# EAGLE board Chamber VIP_Finalbrd(2) (EAGLE 7.6.0)
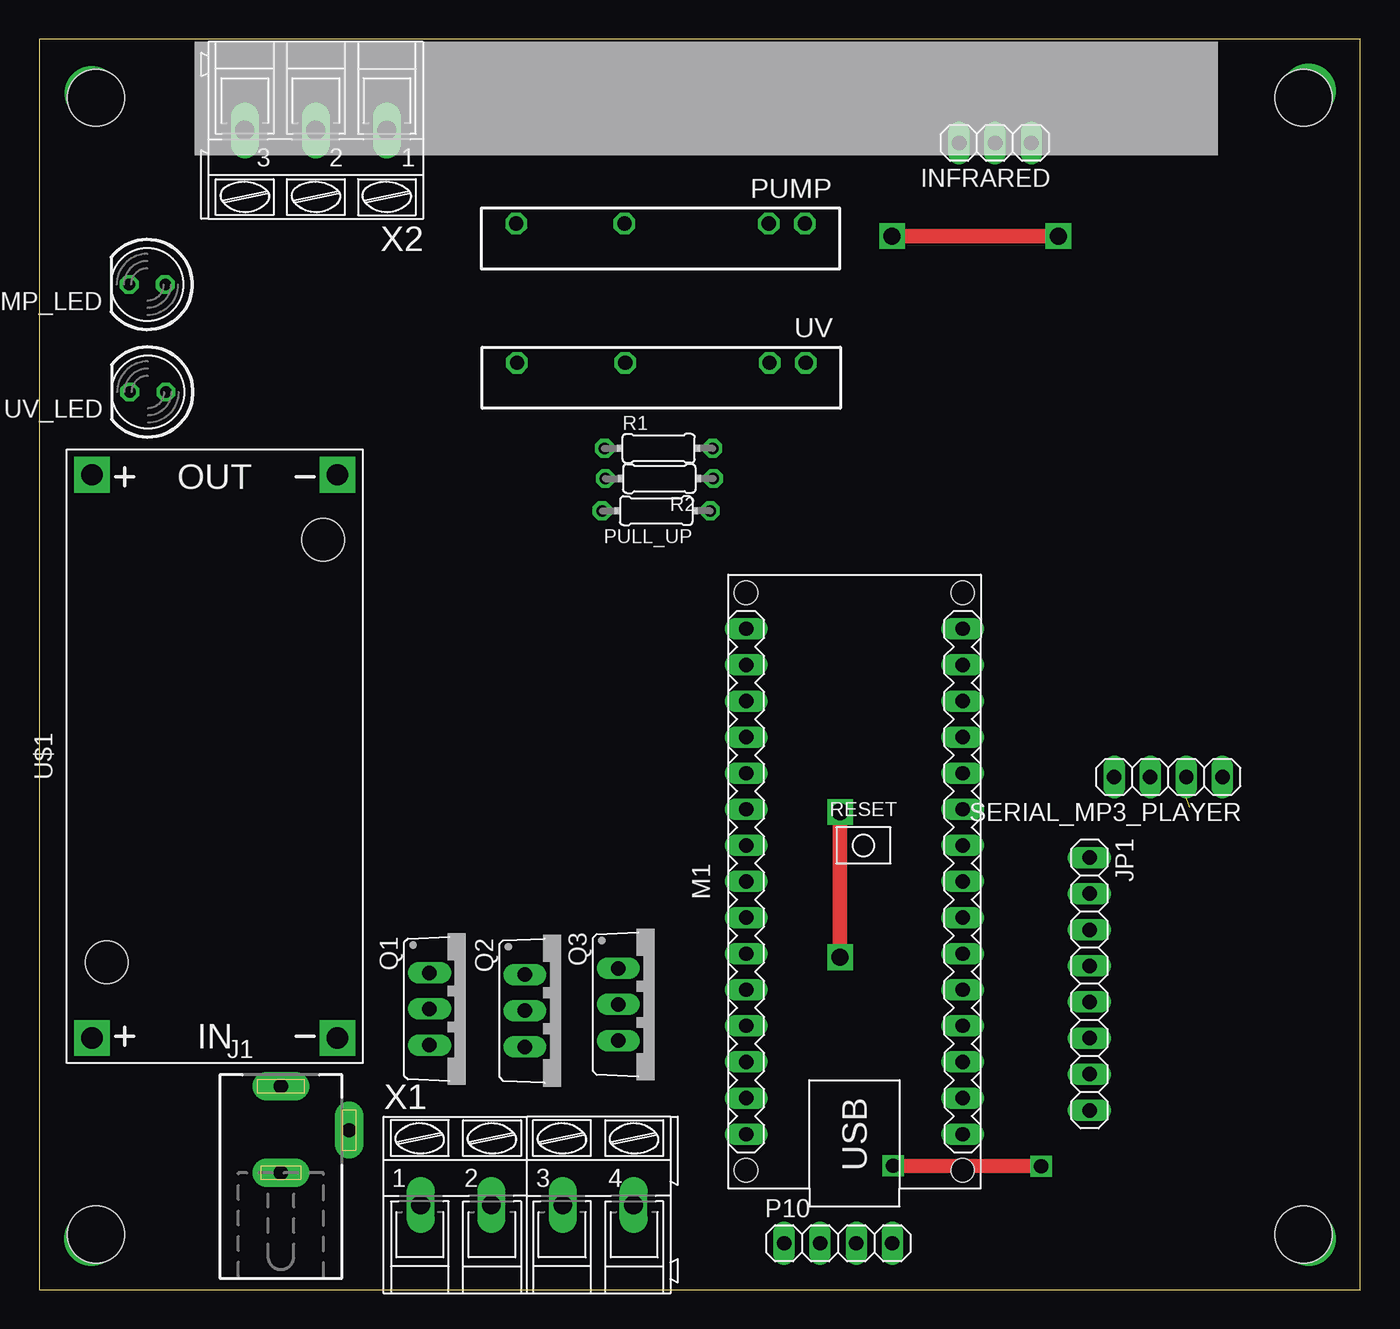
[diagram p0: board, top side]
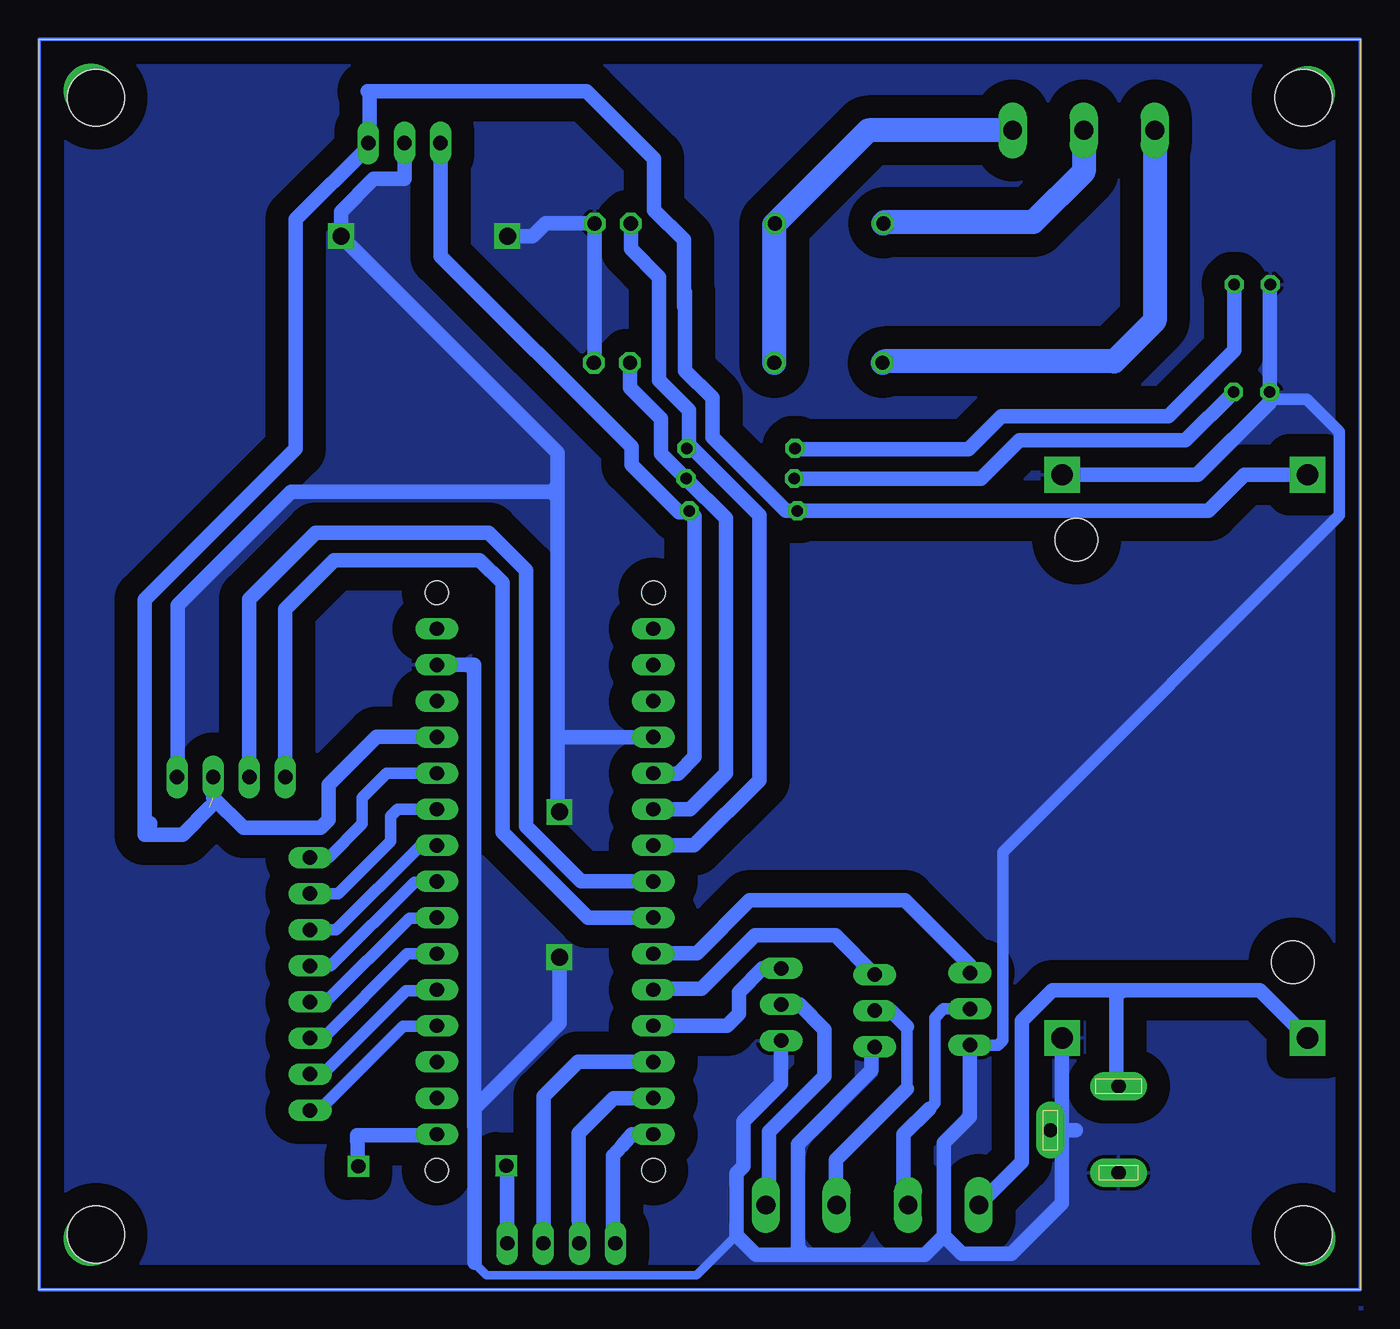
[diagram p1: board, bottom side, seen from below]

Size 93 x 88 mm. Coordinates in mm from the lower left corner, seen from the top.
Outline: 0,0 93,0 93,88 0,88 0,0
Copper layers (1*16): Top 0.035mm / dielectric 1.5mm / Bottom 0.035mm
Design rules "default": minimum track width 10mil, minimum drill 24mil, track to track 8mil, track to pad 8mil, pad to pad 8mil, via to via 8mil, smd to smd 8mil, copper to edge 40mil, drill to drill 8mil, minimum pad ring 10mil, minimum via ring 8mil, stop-mask expansion 4mil, vias tented up to drill 0mil, thermal gap 10mil
Holes 4 mm at 4.01,83.89 89,83.88 89,3.89 4.01,3.89

## Footprints (pad centres in the part's own frame; a part is rotated, then mirrored left to right if it is on the bottom)
1X03 = drill 1.016 long: 1 -2.54,0; 2 0,0; 3 2.54,0
DCJ0202 = drill 1 pad 2 long: 1 0,3.1; 2 4.8,0; 3 0,-3
1X08 = drill 1.016 long: 1 -8.89,0; 2 -6.35,0; 3 -3.81,0; 4 -1.27,0; 5 1.27,0; 6 3.81,0; 7 6.35,0; 8 8.89,0
ARDUINO-NANO-3.0 = drill 1 pad 1.524 long: J1.1 17.78,7.62; J1.2 15.24,7.62; J1.3 12.7,7.62; J1.4 10.16,7.62; J1.5 7.62,7.62; J1.6 5.08,7.62; J1.7 2.54,7.62; J1.8 0,7.62; J1.9 -2.54,7.62; J1.10 -5.08,7.62; J1.11 -7.62,7.62; J1.12 -10.16,7.62; J1.13 -12.7,7.62; J1.14 -15.24,7.62; J1.15 -17.78,7.62; J2.1 17.78,-7.62; J2.2 15.24,-7.62; J2.3 12.7,-7.62; J2.4 10.16,-7.62; J2.5 7.62,-7.62; J2.6 5.08,-7.62; J2.7 2.54,-7.62; J2.8 0,-7.62; J2.9 -2.54,-7.62; J2.10 -5.08,-7.62; J2.11 -7.62,-7.62; J2.12 -10.16,-7.62; J2.13 -12.7,-7.62; J2.14 -15.24,-7.62; J2.15 -17.78,-7.62 | hole 1.651: -20.32,7.62; -20.32,-7.62; 20.32,-7.62; 20.32,7.62
1X04 = drill 1.016 long: 1 -3.81,0; 2 -1.27,0; 3 1.27,0; 4 3.81,0
0204/7 = drill 0.813 octagon: 1 -3.81,0; 2 3.81,0
AQG = drill 1 octagon: + -7.62,0; - -10.16,0; O1 2.54,0; O2 10.16,0
LED5MM = drill 0.813 octagon: A -1.27,0; K 1.27,0
TO220BV = drill 1.016 long: D 0,-2.54; G -2.54,-2.54; S 2.54,-2.54
DC-DC-STEP-DOWN-LM2596 = drill 1.5 pad 2.5 square: IN+ -19.812,8.636; IN- -19.812,-8.636; OUT+ 19.812,8.636; OUT- 19.812,-8.636 | hole 3: -14.478,7.62; 15.24,-7.62
AK300/4 = drill 1.321 long: 1 -7.493,0; 2 -2.515,0; 3 2.515,0; 4 7.493,0
AK300/3 = drill 1.321 long: 1 -5.004,0; 2 0,0; 3 5.004,0

## Placement (x,y rotation side)
INFRARED  [1X03]  67.29,80.71 180 top
J1  DCJ0202  [DCJ0202]  17.02,11.23 0 top
JP1  [1X08]  73.93,21.52 270 top
M1  ARDUINO-NANO-3.0#ISP  [ARDUINO-NANO-3.0]  57.39,28.73 90 top
P10  [1X04]  56.24,3.28 0 top
PULL_UP  10k ohm  [0204/7]  43.44,54.82 180 top
PUMP  AQG12105  [AQG]  43.74,75.02 180 top
PUMP_LED  [LED5MM]  7.61,70.74 180 top
Q1  IRF540  [TO220BV]  30.02,19.76 270 top
Q2  IRF540  [TO220BV]  36.74,19.64 270 top
Q3  IRF540  [TO220BV]  43.31,20.08 270 top
R1  1k ohm  [0204/7]  43.61,59.21 0 top
R2  1k ohm  [0204/7]  43.66,57.08 180 top
SERIAL_MP3_PLAYER  [1X04]  79.48,36.08 180 top
U$1  DC-DC-STEP-DOWN-LM2596  [DC-DC-STEP-DOWN-LM2596]  12.37,37.54 90 top
UV  AQG12105  [AQG]  43.79,65.23 180 top
UV_LED  [LED5MM]  7.65,63.17 180 top
X1  [AK300/4]  34.35,5.97 0 top
X2  [AK300/3]  19.47,81.58 180 top

## Library data of the parts
INFRARED JP1 P10 SERIAL_MP3_PLAYER = pinhead
J1 = con-jack; OC_FARNELL: unknown; OC_NEWARK: unknown
M1 U$1 = diy-modules
PULL_UP R1 R2 = rcl
PUMP UV = relay; MF: AROMAT/ MATSUSHITA; MPN: AQG12105; OC_FARNELL: unknown; OC_NEWARK: 20J4759
PUMP_LED UV_LED = led
Q1-Q3 = transistor-power
X1 X2 = con-ptr500; OC_FARNELL: unknown; OC_NEWARK: unknown

## Nets
3V3: M1.J2.14
+5V: INFRARED.1 M1.J2.4 PULL_UP.2 SERIAL_MP3_PLAYER.2 U$1.OUT+
GND: INFRARED.2 J1.2 J1.3 M1.J1.4 M1.J2.2 PUMP.- PUMP_LED.K Q1.S Q2.S Q3.S SERIAL_MP3_PLAYER.1 U$1.IN- U$1.OUT- UV.- UV_LED.K
N$1: Q3.D X1.4
N$2: J1.1 U$1.IN+ X1.1
N$3: Q1.D X1.2
N$4: Q2.D X1.3
N$5: JP1.8 M1.J2.12
N$6: PUMP.O2 X2.2
N$8: M1.J1.12 Q3.G
N$9: M1.J1.6 R2.1 UV.+
N$10: M1.J1.10 Q1.G
N$11: M1.J1.11 Q2.G
N$12: M1.J1.9 SERIAL_MP3_PLAYER.4
N$13: INFRARED.3 M1.J1.5 PULL_UP.1
N$14: R2.2 UV_LED.A
N$16: PUMP_LED.A R1.1
N$17: M1.J1.8 SERIAL_MP3_PLAYER.3
N$20: M1.J1.7 PUMP.+ R1.2
N$25: M1.J1.15 P10.1
N$26: M1.J1.14 P10.2
N$27: M1.J1.13 P10.3
N$28: M1.J2.15 P10.4
N$29: UV.O2 X2.3
N$30: JP1.7 M1.J2.11
N$31: JP1.6 M1.J2.10
N$32: JP1.5 M1.J2.9
N$33: JP1.4 M1.J2.8
N$34: JP1.3 M1.J2.7
N$35: JP1.2 M1.J2.6
N$36: JP1.1 M1.J2.5
S$3: PUMP.O1 UV.O1 X2.1
VIN: M1.J2.1

## Tracks (layer width: path | path; a pad name or v marks a point on that pad's centre or on a via)
+5V  (1 unrouted)
  Bottom 1.016: 47.6,69.22 47.6,70.25 | 47.6,70.25 47.6,72.62 47.62,72.64 47.62,73.88 49.71,75.97 49.71,79.57 54.47,84.33 69.89,84.33 69.74,84.18 69.74,80.79 | 69.74,80.79 INFRARED.1 | 69.74,80.79 69.74,80.51 74.94,75.32 74.94,59.18 85.56,48.56 85.56,32.04 82.89,32.04 80.98,33.95 | 80.75,34.84 SERIAL_MP3_PLAYER.2 80.75,34.64 78.61,32.5 73.19,32.5 72.62,33.08 72.62,35.55 69.25,38.92 65.03,38.92 M1.J2.4 | U$1.OUT+ 8.18,57.35 10.71,54.82 PULL_UP.2 39.64,54.8 40.42,54.8 45.61,60 45.61,62.76 47.54,64.69 47.54,70.18 47.6,70.25
GND  (via drill 1.2)
  Top 1.016: v60.04,74.14 v71.74,74.14 | v56.38,33.63 v56.38,23.4
  Bottom 0.61: 43.91,3.85 46.73,1.04 61.52,1.04 62.35,1.87 62.35,1.92
  Bottom 0.813: U$1.OUT- 11.64,57.35 6.32,62.67 3.79,62.67 1.48,60.37 1.48,54.49 25.18,30.8 25.18,17.55 25.52,17.21 27.47,17.21 Q1.S
  Bottom 1.016: 20.02,11.23 J1.2 21,12.05 U$1.IN- 21,6.08 24.55,2.54 28.06,2.54 29.33,3.8 | Q2.S 34.42,16.88 34.42,15.44 39.6,10.26 39.6,2.96 39.12,2.49 | Q1.S 27.48,12.2 29.33,10.35 29.33,3.8 | 29.33,3.8 30.65,2.49 39.12,2.49 | 39.12,2.49 42.55,2.49 43.91,3.85 43.91,8.21 43.41,8.71 43.41,11.85 40.77,14.5 Q3.S | 71.4,74.05 71.83,74.05 v71.74,74.14 | 56.5,56.59 56.5,38.86 | 62.35,11.47 62.35,12.78 56.38,18.75 v56.38,23.4 | 62.35,11.47 62.35,1.92 | M1.J1.4 56.47,38.89 56.5,38.86 | 56.5,38.86 56.5,33.75 v56.38,33.63 | 62.35,11.47 62.37,11.49 62.37,43.97 M1.J2.2 | INFRARED.2 67.29,78.16 69.45,78.16 71.74,75.87 v71.74,74.14 | v71.74,74.14 56.5,58.9 56.5,56.59 | 83.25,35.7 83.25,48.18 75.28,56.15 56.94,56.15 | 56.94,56.15 56.6,55.81 | 56.5,56.59 56.94,56.15 | PUMP_LED.K 6.38,70.7 UV_LED.K 6.38,62.42 11.44,57.36 20.99,57.36 U$1.OUT- | v60.04,74.14 58.26,74.14 57.36,75.03 PUMP.- 53.9,65.28 UV.-
  pour Bottom (isolate 1.62): 0,88 93,88 93,0 0,0
  pour Bottom (isolate 1.41): 0.33,87.9 0.03,0 0.03,87.92 0.32,87.92 0.32,87.9
  pour Bottom (isolate 1.016): 0.16,88.88 -0.03,-1.31 -0.03,88.99
N$1
  Bottom 1.016: X1.4 41.62,6.19 41.62,11.13 37.71,15.04 37.71,18.3 39.49,20.08 Q3.D
N$2
  Bottom 1.016: 17.16,21.07 21.68,21.07 22.88,19.87 23.54,19.21 23.82,18.93 23.82,9.01 X1.1 | 17.16,21.07 16.84,21.07 | 16.84,21.07 7.07,21.07 U$1.IN+ | 16.77,21 16.84,21.07 | J1.1 17.16,14.48 17.16,21.07
N$3
  Bottom 0.813: 28.44,19.76 29.34,19.76 29.96,19.14 29.96,13.12 30.33,12.75
  Bottom 1.016: 30.33,12.75 32.15,10.94 32.15,6.29 X1.2 | Q1.D 28.44,19.76
N$4
  Bottom 0.813: 31.91,18.52 31.91,14.16
  Bottom 1.016: Q2.D 33.04,19.64 31.91,18.52 | 31.91,14.16 36.92,9.15 36.92,6.03 X1.3
N$5
  Bottom 0.813: JP1.8 73.3,12.63 67.4,18.53 65.05,18.53 M1.J2.12
N$6
  Bottom 1.676: X2.2 19.47,78.69 23.04,75.12 33.48,75.12 PUMP.O2
N$8
  Bottom 1.016: M1.J1.12 44.6,18.57 43.75,19.42 43.75,20.95 42.08,22.62 Q3.G
N$9
  Bottom 1.016: M1.J1.6 49.75,33.83 47.2,33.83 44.67,36.36 44.67,54.29 R2.1 49.23,58.85 49.23,61.3 51.41,63.49 UV.+
N$10
  Bottom 1.016: M1.J1.10 49.72,23.7 46.7,23.7 42.99,27.4 32.05,27.4 27.48,22.84 Q1.G
N$11
  Bottom 1.016: M1.J1.11 49.69,21.19 46.37,21.19 42.62,24.94 36.96,24.94 Q2.G
N$12
  Bottom 1.016: SERIAL_MP3_PLAYER.4 75.67,47.9 72.22,51.35 61.99,51.35 60.4,49.76 60.4,32.21 54.38,26.19 M1.J1.9
N$13
  Bottom 1.016: INFRARED.3 64.75,74.24 64.75,74.23 64.75,72.74 51.32,59.31 51.32,58.06 47.97,54.71 47.35,54.71 PULL_UP.1 46.86,54.43 46.86,37.51 48.05,36.32 49.74,36.32 M1.J1.5
N$14
  Bottom 1.016: UV_LED.A 12.32,59.78 24,59.78 26.7,57.07 39.83,57.07 R2.2
N$16
  Bottom 1.016: PUMP_LED.A 8.88,66.1 13.52,61.46 25.27,61.46 27.58,59.16 39.75,59.16 R1.1
N$17
  Bottom 1.016: M1.J1.8 54.86,28.73 58.73,32.61 58.73,50.63 61.37,53.26 73.54,53.26 78.21,48.59 SERIAL_MP3_PLAYER.3
N$18  (via drill 2.8 pad 3.81)
  other vias: 89.36,3.59
N$20
  Bottom 1.016: R1.2 47.25,59.38 | 47.25,59.38 47.2,59.38 42.31,54.49 42.31,35.87 46.9,31.27 M1.J1.7 | 47.25,59.38 47.25,61.89 49.37,64.01 49.37,71.26 51.34,73.24 51.34,75.01 PUMP.+
N$21  (via drill 2.8 pad 3.81)
  other vias: 3.68,3.6
N$23  (via drill 2.8 pad 3.81)
  other vias: 89.35,84.37
N$24  (via drill 2.8 pad 3.81)
  other vias: 3.71,84.2
N$25
  Bottom 1.016: P10.1 52.59,4.16 52.59,9.43 51.98,10.12 51.26,10.95 M1.J1.15
N$26
  Bottom 1.016: P10.2 55.04,5.3 55.04,11.03 52.58,13.49 M1.J1.14
N$27
  Bottom 1.016: P10.3 57.49,5.21 57.49,13.63 55.08,16.03 M1.J1.13
N$28  (via drill 1)
  Top 1.016: v60.12,8.73 v70.53,8.69
  Bottom 1.016: v70.53,8.69 70.61,10.89 65.07,10.89 M1.J2.15 | v60.12,8.73 60.05,8.67 P10.4
N$29
  Bottom 1.676: X2.3 14.47,68.2 17.33,65.34 33.53,65.34 UV.O2
N$30
  Bottom 0.813: JP1.7 73.04,15.17 67.16,21.06 65.06,21.06 M1.J2.11
N$31
  Bottom 0.813: JP1.6 73.03,17.71 67.11,23.63 65.03,23.63 M1.J2.10
N$32
  Bottom 0.813: JP1.5 72.83,20.25 66.92,26.16 65.04,26.16 M1.J2.9
N$33
  Bottom 0.813: JP1.4 72.47,22.79 66.58,28.68 65.06,28.68 M1.J2.8
N$34
  Bottom 0.813: JP1.3 72.08,25.33 66.19,31.23 65.05,31.23 M1.J2.7
N$35
  Bottom 0.813: JP1.2 71.96,27.87 68.26,31.58 68.26,33.32 67.77,33.81 M1.J2.6
N$36
  Bottom 0.813: JP1.1 72.62,30.41 70.26,32.78 70.26,34.64 68.56,36.34 M1.J2.5
S$1
  Bottom 1.016: 85.19,32.73 85.19,32.85 85.3,32.85 85.3,32.05
S$2
  Bottom 0.254: 0,88 93,88 93,0 0,0 0,88
S$3
  Bottom 1.676: X2.1 34.64,81.58 PUMP.O1 41.25,74.97 UV.O1